# Altium PCB GROUND_TOP.PcbDoc
Units mm, origin at the board's own origin, x right, y up, seen from the top; angles counter-clockwise.
Board outline 43.94 x 42.93 mm, 2 copper layers (Top Layer, Bottom Layer); 82 components, 0 nets, 288 pads, 66 vias.
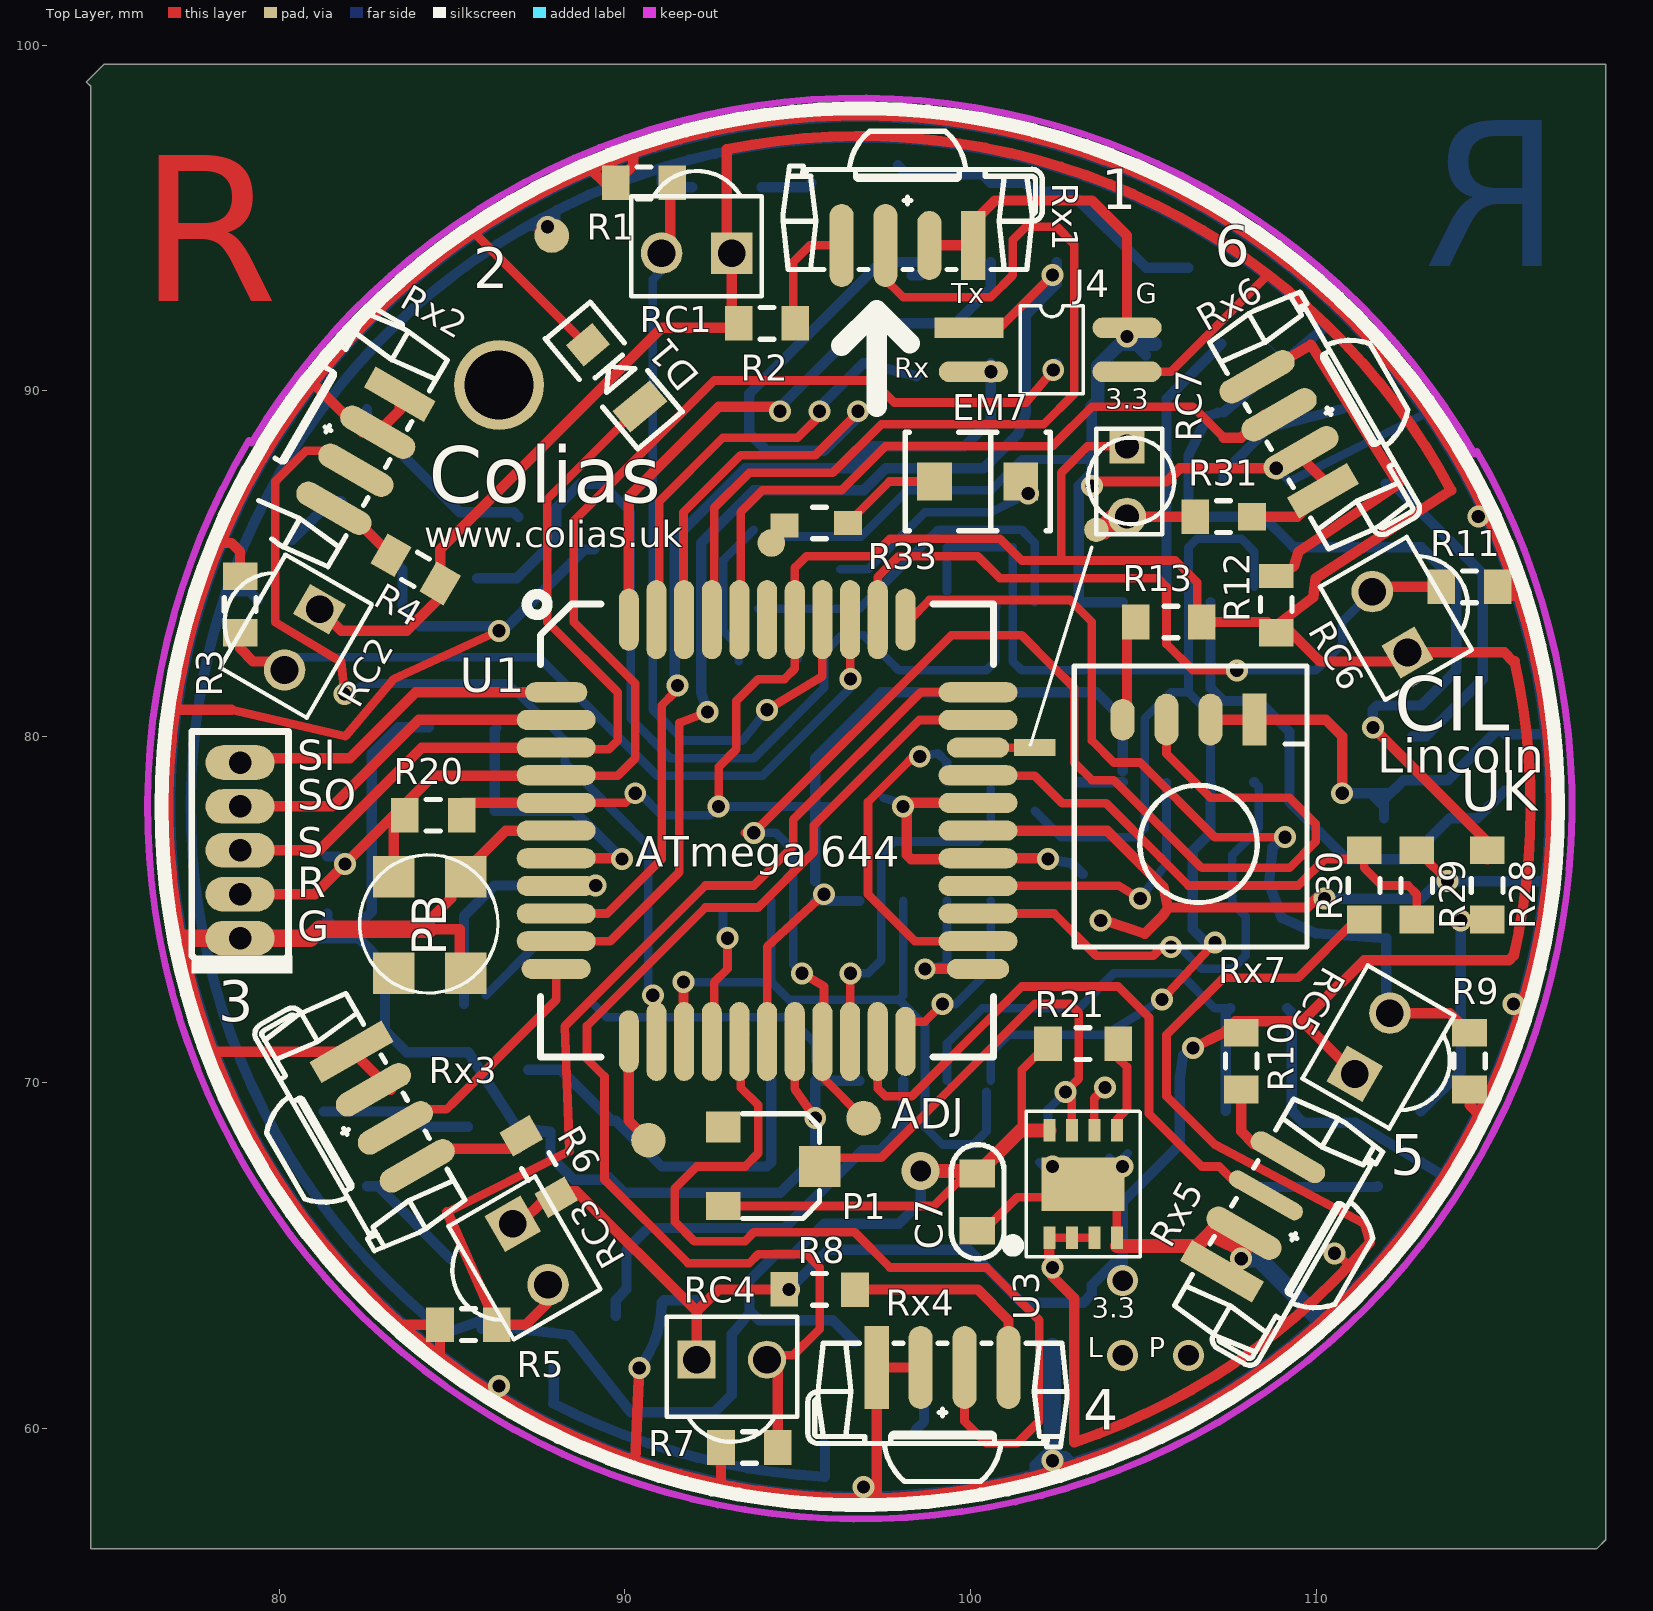
[diagram p0: Top Layer view]
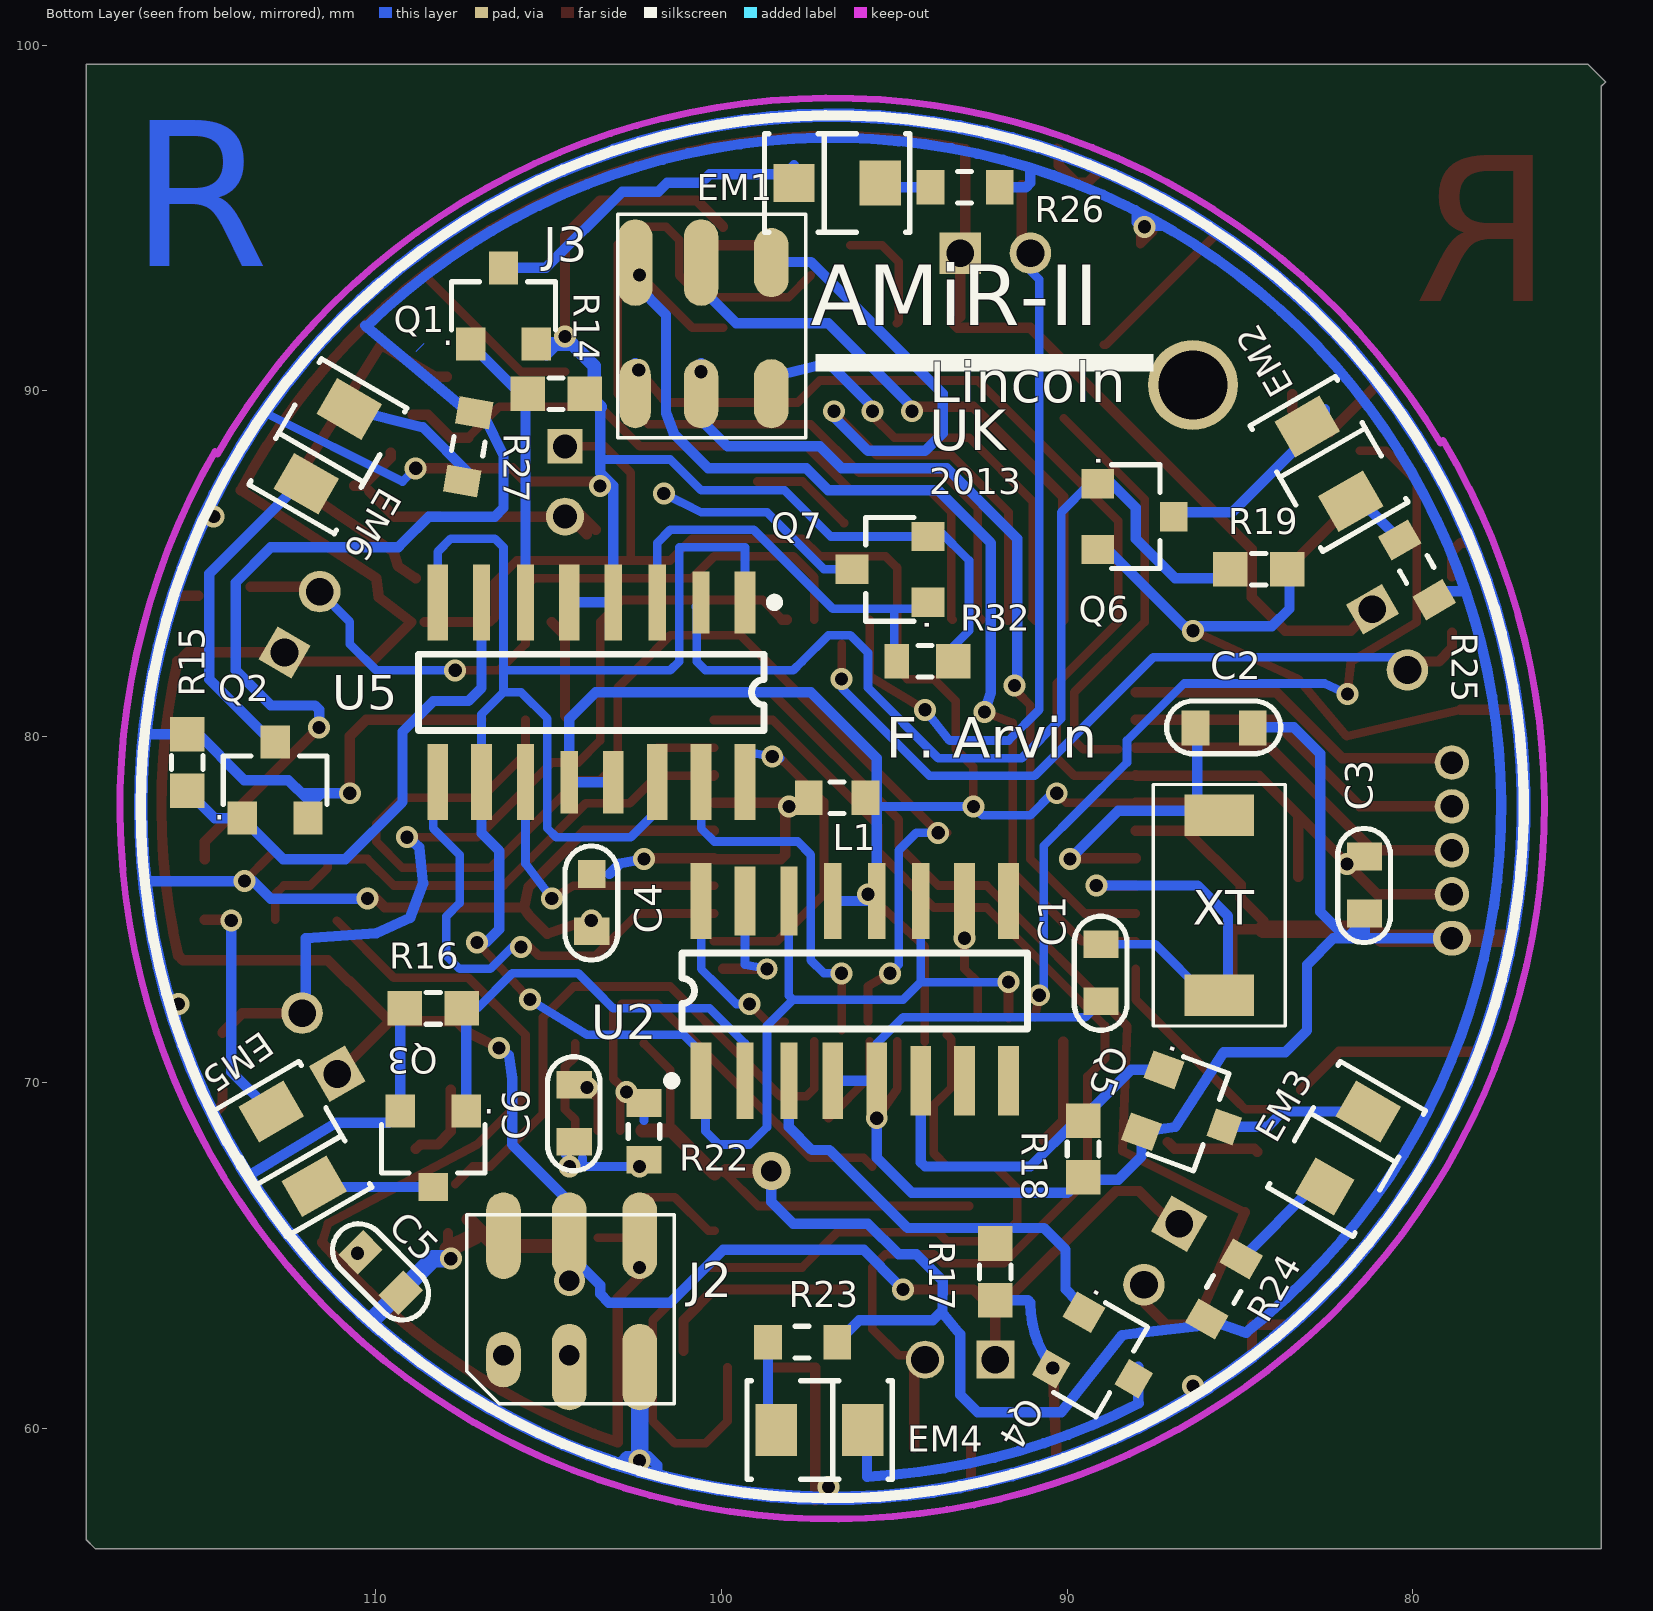
[diagram p1: Bottom Layer view, seen from below]

## Layer stack, top to bottom
Top Layer: signal copper 0.0356
Dielectric: dielectric 0.32, FR-4, Dk 4.8
Bottom Layer: signal copper 0.0356

## Board outline
74.422,98.933 74.549,98.806 74.549,56.515 118.11,56.515 118.364,56.769 118.364,99.441 74.93,99.441 74.422,98.933

## Design rules (kind name [scope] priority, off if disabled: settings)
Clearance [All] p1: gap=0.254
ComponentClearance [All] p1: gap=0.254 collisioncheckmode=3 verticalgap=0.254
PolygonConnect [All] p1: connectstyle=Relief reliefconductorwidth=0.254 reliefentries=4 polygonreliefangle="90 Angle"
RoutingVias [All] p1: holewidth=0.711 width=1.27 viastyle="Through Hole" minholewidth=0.711 minwidth=1.27 maxholewidth=0.711 maxwidth=1.27
SolderMaskExpansion [All] p1: expansion=0.102
TestPointUsage [All] p1: valid=0 allowmultiple=FALSE
Testpoint [All] p1: side=15 testpointundercomponent=TRUE minsize=1.016 maxsize=2.54 preferedsize=1.524 minholesize=0 maxholesize=1.016 preferedholesize=0.813 testpointgrid=0.025 style=1023 order=0-112345678
Width [All] p1: maxlimit=0.254 minlimit=0.254 preferedwidth=0.254
18 further rules are at their usual default settings.

## Components (designator, comment, footprint, x,y, rotation, side; value= is the part's Value field where it differs from the comment)
C1 "104" 0603C#1 89.027,73.152 r90 bottom (schematic designator C14)
C2 "104" 0603C#1 85.471,80.264 r180 bottom (schematic designator C14)
C3 "104" 0603C#1 81.407,75.692 r90 bottom (schematic designator C14)
C4 "104" 0603C#2 103.759,75.184 r90 bottom (schematic designator C14)
C5 "104" 0603C#1 109.855,64.516 r225 bottom (schematic designator C14)
C6 "104" 0603C#1 104.267,69.088 r90 bottom (schematic designator C14)
C7 "104" 0603C#1 100.203,66.548 r270 top (schematic designator C14)
D1 "LED0" 0805L 90.551,89.408 r310 top (schematic designator D4)
EM1 "" "PLCC-2 Acodado"#1 96.647,96.012 r0 bottom (schematic designator D7)
EM2 "" "PLCC-2 Acodado"#2 82.423,87.884 r60 bottom (schematic designator D7)
EM3 "" "PLCC-2 Acodado"#3 81.915,68.072 r120 bottom (schematic designator D7)
EM4 "" "PLCC-2 Acodado"#2 97.155,59.944 r180 bottom (schematic designator D7)
EM5 "" "PLCC-2 Acodado"#2 112.395,68.072 r240 bottom (schematic designator D7)
EM6 "" "PLCC-2 Acodado"#2 111.379,88.392 r300 bottom (schematic designator D7)
EM7 "" "PLCC-2 Acodado"#4 100.203,87.376 r0 top (schematic designator D7)
J2 "Comment" DIP6-2mm#1 102.362,64.516 r270 bottom
J3 "Comment" DIP6-2mm#2 98.552,92.456 r270 bottom
J4 "Comment" SOP4 99.695,91.821 r0 top
L1 "47ohm 0603" R0603(1608)#1 96.647,78.232 r180 bottom (schematic designator R46)
P1 "FDV301N" SOT23#1 94.107,67.564 r270 top (schematic designator V48)
Q1 "FDV301N" SOT23#2 106.299,92.456 r180 bottom (schematic designator V48)
Q2 "FDV301N" SOT23#2 112.903,78.74 r180 bottom (schematic designator V48)
Q3 "FDV301N" SOT23#3 108.331,68.072 r0 bottom (schematic designator V48)
Q4 "FDV301N" SOT23#4 89.027,61.976 r300 bottom (schematic designator V48)
Q5 "FDV301N" SOT23#3 86.487,69.088 r290 bottom (schematic designator V48)
Q6 "FDV301N" SOT23#3 88.011,86.36 r270 bottom (schematic designator V48)
Q7 "FDV301N" SOT23#2 95.123,84.836 r90 bottom (schematic designator V48)
R1 "47ohm 0603" R0603(1608)#1 90.551,96.012 r0 top (schematic designator R46)
R2 "47ohm 0603" R0603(1608)#1 94.107,91.948 r0 top (schematic designator R46)
R3 "47ohm 0603" R0603(1608)#1 78.867,83.82 r90 top (schematic designator R46)
R4 "47ohm 0603" R0603(1608)#1 83.947,84.836 r330 top (schematic designator R46)
R5 "47ohm 0603" R0603(1608)#1 85.471,62.992 r0 top (schematic designator R46)
R6 "47ohm 0603" R0603(1608)#2 87.503,67.564 r120 top (schematic designator R46)
R7 "47ohm 0603" R0603(1608)#1 93.599,59.436 r0 top (schematic designator R46)
R8 "47ohm 0603" R0603(1608)#2 95.631,64.008 r0 top (schematic designator R46)
R9 "47ohm 0603" R0603(1608)#1 114.427,70.612 r90 top (schematic designator R46)
R10 "47ohm 0603" R0603(1608)#1 107.823,70.612 r90 top (schematic designator R46)
R11 "47ohm 0603" R0603(1608)#1 114.427,84.328 r0 top (schematic designator R46)
R12 "47ohm 0603" R0603(1608)#3 108.839,83.82 r90 top (schematic designator R46)
R13 "47ohm 0603" R0603(1608)#4 105.791,83.312 r0 top (schematic designator R46)
R14 "47ohm 0603" R0603(1608)#5 104.775,89.916 r0 bottom (schematic designator R46)
R15 "47ohm 0603" R0603(1608)#5 115.443,79.248 r270 bottom (schematic designator R46)
R16 "47ohm 0603" R0603(1608)#5 108.331,72.136 r0 bottom (schematic designator R46)
R17 "47ohm 0603" R0603(1608)#5 92.075,64.516 r270 bottom (schematic designator R46)
R18 "47ohm 0603" R0603(1608)#5 89.535,68.072 r270 bottom (schematic designator R46)
R19 "47ohm 0603" R0603(1608)#5 84.455,84.836 r0 bottom (schematic designator R46)
R20 "47ohm 0603" R0603(1608)#1 84.455,77.724 r0 top (schematic designator R46)
R21 "47ohm 0603" R0603(1608)#6 103.251,71.12 r0 top (schematic designator R46)
R22 "47ohm 0603" R0603(1608)#1 102.235,68.58 r270 bottom (schematic designator R46)
R23 "47ohm 0603" R0603(1608)#7 97.663,62.484 r0 bottom (schematic designator R46)
R24 "47ohm 0603" R0603(1608)#7 85.471,64.008 r300 bottom (schematic designator R46)
R25 "47ohm 0603" R0603(1608)#7 79.883,84.836 r60 bottom (schematic designator R46)
R26 "47ohm 0603" R0603(1608)#7 92.964,95.885 r0 bottom (schematic designator R46)
R27 "47ohm 0603" R0603(1608)#7 107.315,88.392 r100 bottom (schematic designator R46)
R28 "47ohm 0603" R0603(1608)#7 114.935,75.692 r270 top (schematic designator R46)
R29 "47ohm 0603" R0603(1608)#7 112.903,75.692 r270 top (schematic designator R46)
R30 "47ohm 0603" R0603(1608)#7 111.379,75.692 r270 top (schematic designator R46)
R31 "47ohm 0603" R0603(1608)#8 107.315,86.36 r0 top (schematic designator R46)
R32 "47ohm 0603" R0603(1608)#9 94.107,82.176 r0 bottom (schematic designator R46)
R33 "47ohm 0603" R0603(1608)#10 95.631,86.176 r0 top (schematic designator R46)
RC1 "Comment" LED-1#1 92.075,91.948 r90 top
RC2 "Comment" LED-1#2 82.423,81.788 r150 top
RC3 "Comment" LED-1#1 89.027,66.04 r210 top
RC4 "Comment" LED-1#3 93.091,64.008 r270 top
RC5 "Comment" LED-1#1 109.855,72.136 r330 top
RC6 "Comment" LED-1#4 110.363,82.296 r30 top
RC7 "Comment" LED-1#5 106.553,87.376 r180 top
Rx1 "" TSOP5700TR#1 98.171,95.504 r0 top (schematic designator D24)
Rx2 "" TSOP5700TR#2 81.407,88.9 r60 top (schematic designator D24)
Rx3 "" TSOP5700TR#3 81.915,68.58 r120 top (schematic designator D24)
Rx4 "" TSOP5700TR#3 99.187,60.452 r180 top (schematic designator D24)
Rx5 "" TSOP5700TR#4 109.347,65.532 r240 top (schematic designator D24)
Rx6 "" TSOP5700TR#2 110.363,89.408 r300 top (schematic designator D24)
Rx7 "" TSOP5700TR#5 106.299,81.788 r0 top locked (schematic designator D24)
U1 "Comment" TQFP-44 88.011,81.28 r0 top locked
U2 "Comment" SOIC16#1 96.139,72.644 r180 bottom locked
U3 "-" "8-DFN 3X3X09" 103.251,67.056 r0 top (schematic designator N14)
U5 "Comment" SOIC16#2 103.759,81.28 r0 bottom locked
? "Comment" MHDR1X5#1 78.867,74.168 r90 top
? "Comment" MHDR1X5#2 78.867,74.168 r90 top locked
? "Comment" "PCBComponent_1 - duplicate4" 84.455,74.676 r90 top
? "Comment" "PCBComponent_1 - duplicate3" 85.471,75.184 r270 bottom locked

## Footprints (in the part's own frame and the unit in brackets; to place one, negate y for a bottom-side part, rotate by r counter-clockwise, add the part's x,y. Pads: shape width x height; smd on the part's side, far side on the other; paste and mask are expansions set on the pad)
"8-DFN 3X3X09" [mm] "8-Lead Plastic Dual Flat, No Lead Pack 3x3x0.9mm"
  rect 2.4x1.55 smd: 9(0,0)
  rect 0.35x0.65 smd: Adj(-0.325,1.55) C(0.325,1.55) GND(0.975,-1.55) OUT(-0.975,1.55) PWR(0.975,1.55) SHDN(0.325,-1.55) Vin(-0.975,-1.55) Vin(-0.325,-1.55)
  silkscreen extent -2.16,-2.1 1.65,2.1
0603C#1 [mil]
  rect 31.5x40 smd: 1(-32,-0.5) 2(33,-0.5)
  silkscreen extent -65,-30 65,30
0603C#2 [mil]
  rect 31.5x40 smd: 1(-32,-0.5)
  rect 31.5x31.5 smd: 2(33,-0.5)
  silkscreen extent -65,-30 65,30
0805L [mm]
  rect 0.8x1.4 smd: 1(-0.18,0)
  rect 0.8x1 smd: 2(-2.514,0)
  silkscreen extent -3.45,-0.84 0.72,0.84
DIP6-2mm#1 [mm]
  oval 2.5x1 smd: 3.3V(-1.047,-2.032) BAT(-1.047,0) GND(2.753,0) Light(2.753,-2.032) SP(-1.047,-3.937)
  oval 1.6x1 smd: SP(2.54,-3.937)
  silkscreen extent -1.65,-5 3.81,1
DIP6-2mm#2 [mm]
  oval 2x1 smd: LED(-1.25,0) LPWM(2.54,0) TXD(2.54,-2.032)
  oval 2.5x1 smd: RPWM(-1.25,-2.032) RXD(-1.25,-3.937)
  oval 2x0.9 smd: RST(2.54,-3.937)
  silkscreen extent -2.65,-4.45 3.81,1
LED-1#1 [mm]
  round 1.2 hole 0.8: 1(2.032,1.016)
  rect 1.2x1.2 hole 0.8: 2(2.032,-1.016)
  silkscreen extent 0.79,-1.89 4.41,1.89
LED-1#2 [mm]
  round 1.2 hole 0.8: 1(2.032,1.016)
  rect 1.2x1 hole 0.8: 2(2.032,-1.016)
  silkscreen extent 0.79,-1.89 4.41,1.89
LED-1#3 [mm]
  round 1.1 hole 0.8: 1(2.032,1.016)
  rect 1.1x1.1 hole 0.8: 2(2.032,-1.016)
  silkscreen extent 0.79,-1.89 4.41,1.89
LED-1#4 [mm]
  round 1.2 hole 0.8: 1(2.032,1.016)
  rect 1.1x1.1 hole 0.8: 2(2.032,-1.016)
  silkscreen extent 0.79,-1.89 4.41,1.89
LED-1#5 [mm]
  round 1.1 hole 0.7: 1(2.032,1.016)
  rect 1x1 hole 0.7: 2(2.032,-1.016)
  silkscreen extent 0.66,-1.52 3.16,1.52
MHDR1X5#1 [mm]
  oval 1x2 smd: GND(0,0) MISO(3.81,0) MOSI(5.08,0) RST(1.27,0) SCK(2.54,0)
  silkscreen extent -0.9,-1.4 5.98,1.4
MHDR1X5#2 [mm]
  oval 1x1.1 hole 0.65: GND(0,0)
  round 1 hole 0.65: MISO(3.81,0) MOSI(5.08,0) RST(1.27,0) SCK(2.54,0)
"PCBComponent_1 - duplicate3" [mm]
  rect 1.2x2 smd: X(-2.54,-0.127) X(2.667,-0.127)
  silkscreen extent -3.43,-2.03 3.56,1.78
"PCBComponent_1 - duplicate4" [mm]
  rect 1.2x1.2 smd: A(-1.527,-0.946) A(1.273,-0.946) B(-1.524,1.143) B(1.27,1.143)
  silkscreen extent -2.09,-1.87 1.9,2.12
"PLCC-2 Acodado"#1 [mm] "SMD LED Acodado; 2 C-Bend Leads; Body 3.8 x 3.8mm,"
  rect 1.2x1.3 smd: 1(-1.25,0)
  rect 1.2x1.1 smd: 2(1.25,0)
  silkscreen extent -2.1,-1.43 2.1,1.43
"PLCC-2 Acodado"#2 [mm] "SMD LED Acodado; 2 C-Bend Leads; Body 3.8 x 3.8mm,"
  rect 1.2x1.5 smd: 1(-1.25,0) 2(1.25,0)
  silkscreen extent -2.1,-1.43 2.1,1.43
"PLCC-2 Acodado"#3 [mm] "SMD LED Acodado; 2 C-Bend Leads; Body 3.8 x 3.8mm,"
  rect 1.2x1.3 smd: 1(-1.25,0)
  rect 1.2x1.5 smd: 2(1.25,0)
  silkscreen extent -2.1,-1.43 2.1,1.43
"PLCC-2 Acodado"#4 [mm] "SMD LED Acodado; 2 C-Bend Leads; Body 3.8 x 3.8mm,"
  rect 1x1.1 smd: 1(-1.25,0) 2(1.25,0)
  silkscreen extent -2.1,-1.43 2.1,1.43
R0603(1608)#1 [mm] "Chip Resistor, Body 1.6x0.8mm, IPC Medium Density"
  rect 0.8x1 smd: 1(-0.82,0) 2(0.82,0)
  silkscreen extent -0.2,-0.46 0.2,0.46
R0603(1608)#2 [mm] "Chip Resistor, Body 1.6x0.8mm, IPC Medium Density"
  rect 0.8x1 smd: 1(-1.024,0.005) 2(1.024,-0.005)
  silkscreen extent -0.2,-0.46 0.2,0.46
R0603(1608)#3 [mm] "Chip Resistor, Body 1.6x0.8mm, IPC Medium Density"
  rect 0.8x1 smd: 1(-0.82,0)
  rect 0.7x1 smd: 2(0.82,0)
  silkscreen extent -0.2,-0.46 0.2,0.46
R0603(1608)#4 [mm] "Chip Resistor, Body 1.6x0.8mm, IPC Medium Density"
  rect 0.8x1 smd: 1(-1.016,0) 2(0.889,0)
  silkscreen extent -0.2,-0.46 0.2,0.46
R0603(1608)#5 [mm] "Chip Resistor, Body 1.6x0.8mm, IPC Medium Density"
  rect 1x1 smd: 1(-0.82,0) 2(0.82,0)
  silkscreen extent -0.2,-0.46 0.2,0.46, body extent -0.85,-0.48 0.85,0.48, height 0.6
R0603(1608)#6 [mm] "Chip Resistor, Body 1.6x0.8mm, IPC Medium Density"
  rect 0.8x1 smd: 1(-1.016,0) 2(1.016,0)
  silkscreen extent -0.2,-0.46 0.2,0.46, body extent -0.85,-0.48 0.85,0.48, height 0.6
R0603(1608)#7 [mm] "Chip Resistor, Body 1.6x0.8mm, IPC Medium Density"
  rect 0.8x1 smd: 1(-1.016,0) 2(0.986,0)
  silkscreen extent -0.2,-0.46 0.2,0.46
R0603(1608)#8 [mm] "Chip Resistor, Body 1.6x0.8mm, IPC Medium Density"
  rect 0.8x1 smd: 1(-0.82,0)
  rect 0.8x0.8 smd: 2(0.82,0)
  silkscreen extent -0.2,-0.46 0.2,0.46
R0603(1608)#9 [mm] "Chip Resistor, Body 1.6x0.8mm, IPC Medium Density"
  rect 1x1 smd: 1(-0.82,0)
  rect 0.7x1 smd: 2(0.82,0)
  silkscreen extent -0.2,-0.46 0.2,0.46, body extent -0.85,-0.48 0.85,0.48, height 0.6
R0603(1608)#10 [mm] "Chip Resistor, Body 1.6x0.8mm, IPC Medium Density"
  rect 0.8x0.7 smd: 1(-1.016,-0.07) 2(0.82,0)
  silkscreen extent -0.2,-0.46 0.2,0.46
SOIC16#1 [mm] "Small Outline; 16 Leads; Body Width 3.9 mm; Pitch 1.27 mm"
  rect 0.6x2.2 smd: 1(-4.445,-2.6) 4(-0.635,-2.6) 5(0.635,-2.6) 9(4.445,2.6) 10(3.175,2.6) 16(-4.445,2.6)
  rect 0.5x2.2 smd: 2(-3.175,-2.6) 3(-1.905,-2.6) 11(1.905,2.6) 12(0.635,2.6) 13(-0.635,2.6)
  rect 0.6x2 smd: 6(1.905,-2.6) 7(3.175,-2.6) 8(4.445,-2.6) 15(-3.175,2.6)
  rect 0.5x2 smd: 14(-1.905,2.6)
  silkscreen extent -5.42,-2.72 5,1.1
SOIC16#2 [mm] "Small Outline; 16 Leads; Body Width 3.9 mm; Pitch 1.27 mm"
  rect 0.6x1.8 smd: 1(-4.445,-2.6) 13(-0.635,2.6)
  rect 0.5x1.8 smd: 2(-3.175,-2.6) 12(0.635,2.6)
  rect 0.5x2.2 smd: 3(-1.905,-2.6) 4(-0.635,-2.6) 6(1.905,-2.6) 7(3.175,-2.6) 11(1.905,2.6)
  rect 0.6x2.2 smd: 5(0.635,-2.6) 8(4.445,-2.6) 9(4.445,2.6) 10(3.175,2.6) 14(-1.905,2.6) 15(-3.175,2.6) 16(-4.445,2.6)
  silkscreen extent -5.42,-2.72 5,1.1
SOP4 [mm]
  oval 2x0.6 smd: 3.3V(4.826,-1.27) GND(4.826,0) RxD(0.381,-1.27)
  rect 2x0.6 smd: TxD(0.254,0)
  silkscreen extent 1.74,-1.91 3.56,0.64
SOT23#1 [mm] "SOT23, 3-Leads, Body 2.9x1.3mm, Pitch 0.95mm, Lead Span 2.5mm, IPC Medium Density"
  rect 0.9x1 smd: 1(-1.143,-1.27)
  rect 0.8x1 smd: 2(1.143,-1.27)
  rect 1.2x1.2 smd: 3(0,1.524)
  silkscreen extent -1.52,-0.7 1.5,1.52
SOT23#2 [mm] "SOT23, 3-Leads, Body 2.9x1.3mm, Pitch 0.95mm, Lead Span 2.5mm, IPC Medium Density"
  rect 0.85x0.95 smd: Drain(0,1.1) Gate(-0.95,-1.1) S(0.95,-1.1)
  silkscreen extent -1.5,-0.7 1.5,0.7, body extent -1.5,-0.7 1.5,0.7, height 1.1
SOT23#3 [mm] "SOT23, 3-Leads, Body 2.9x1.3mm, Pitch 0.95mm, Lead Span 2.5mm, IPC Medium Density"
  rect 0.85x0.8 smd: Drain(0,1.1)
  rect 0.85x0.95 smd: Gate(-0.95,-1.1) S(0.95,-1.1)
  silkscreen extent -1.5,-0.7 1.5,0.7, body extent -1.5,-0.7 1.5,0.7, height 1.1
SOT23#4 [mm] "SOT23, 3-Leads, Body 2.9x1.3mm, Pitch 0.95mm, Lead Span 2.5mm, IPC Medium Density"
  rect 0.85x0.8 smd: Drain(0,1.1) S(0.95,-1.1)
  rect 0.85x0.95 smd: Gate(-0.95,-1.1)
  silkscreen extent -1.5,-0.7 1.5,0.7, body extent -1.5,-0.7 1.5,0.7, height 1.1
TQFP-44 [mm]
  oval 1.8x0.58 smd: 1(0,0) 23(12.2,-8) 31(12.2,-1.6)
  oval 2.286x0.58 smd: 2(0,-0.8) 3(0,-1.6) 4(0,-2.4) 5(0,-3.2) 6(0,-4) 7(0,-4.8) 8(0,-5.6) 9(0,-6.4) 10(0,-7.2) 24(12.2,-7.2) 25(12.2,-6.4) 26(12.2,-5.6) 27(12.2,-4.8) 28(12.2,-4) 29(12.2,-3.2) 30(12.2,-2.4) 32(12.2,-0.8) 33(12.2,0)
  oval 2x0.58 smd: 11(0,-8)
  oval 0.58x1.8 smd: 12(2.1,-10.1) 34(10.1,2.1) 44(2.1,2.1)
  oval 0.58x2.286 smd: 13(2.9,-10.1) 14(3.7,-10.1) 15(4.5,-10.1) 16(5.3,-10.1) 17(6.1,-10.1) 18(6.9,-10.1) 19(7.7,-10.1) 20(8.5,-10.1) 21(9.3,-10.1) 35(9.3,2.1) 36(8.5,2.1) 37(7.7,2.1) 38(6.9,2.1) 39(6.1,2.1) 40(5.3,2.1) 41(4.5,2.1) 42(3.7,2.1) 43(2.9,2.1)
  oval 0.58x2 smd: 22(10.1,-10.1)
  silkscreen extent -0.45,-10.55 12.65,2.55
TSOP5700TR#1 [mm] "Vishay IR, Top Mount, Body 7.5x4mm"
  oval 0.7x2 smd: GND(0.635,-1.3)
  rect 0.7x2 smd: GND(1.905,-1.3)
  oval 0.7x2.4 smd: OUT(-0.635,-1.3) V(-1.905,-1.3)
  silkscreen extent -3.6,-2 3.9,2
TSOP5700TR#2 [mm] "Vishay IR, Top Mount, Body 7.5x4mm"
  oval 0.7x2.4 smd: GND(0.635,-1.3) OUT(-0.635,-1.3) V(-1.905,-1.3)
  rect 0.7x2 smd: GND(1.905,-1.3)
  silkscreen extent -3.6,-2 3.7,0.9
TSOP5700TR#3 [mm] "Vishay IR, Top Mount, Body 7.5x4mm"
  oval 0.7x2.4 smd: GND(0.635,-1.3) OUT(-0.635,-1.3) V(-1.905,-1.3)
  rect 0.7x2.4 smd: GND(1.905,-1.3)
  silkscreen extent -3.6,-2 3.9,2
TSOP5700TR#4 [mm] "Vishay IR, Top Mount, Body 7.5x4mm"
  oval 0.7x2.4 smd: GND(0.635,-1.3)
  rect 0.7x2.4 smd: GND(1.905,-1.3)
  oval 0.5x2.4 smd: OUT(-0.635,-1.3)
  oval 0.6x2.4 smd: V(-1.905,-1.3)
  silkscreen extent -3.6,-2 3.9,2
TSOP5700TR#5 [mm] "Vishay IR, Top Mount, Body 7.5x4mm"
  oval 0.7x1.5 smd: GND(0.635,-1.3) OUT(-0.635,-1.3)
  rect 0.7x1.5 smd: GND(1.905,-1.3)
  oval 0.7x1.2 smd: V(-1.905,-1.3)
  silkscreen extent -3.3,-7.87 3.43,0.25

## Part data
C1 C2 C3 C4 C5 C6 C7: library part CAP, "Capacitor"
D1: "Typical INFRARED GaAs LED"
EM1 EM2 EM3 EM4 EM5 EM6 EM7: library part SFH4655Z, "LED IR 850nM SMD 20º"
L1 R1 R2 R3 R4 R5 R6 R7 R8 R9 R10 R11 R12 R13 R14 R15 R16 R17 R18 R19 R20 R21 R22 R23 R24 R25 R26 R27 R28 R29 R30 R31 R32 R33: library part "R47 0603 5%", "Resistencia SMT Generica"
P1 Q1 Q2 Q3 Q4 Q5 Q6 Q7: "N-Channel MOSFET, 0.22A, 25V Vgs=2.7V Rds(on)=5"
Rx1 Rx2 Rx3 Rx4 Rx5 Rx6 Rx7: library part TSOP5700TR, "Infrared Receiver Module 2.7-5.5V 455kHz"
U3: library part MCP1727-ADJE/MF

## Free pads (board coordinates)
  round 1 smd: 0(87.884,94.488) 0(90.678,68.326) 0(96.901,68.961)
  round 0.8 smd: 0(94.234,85.598)
  rect 1.2x0.5 smd: 0(101.854,79.68)
  round 0.7 smd: 0(103.632,85.979)
  round 2.6 hole 2: 3(86.36,90.17)

## Via types
v1: diameter 0.635, hole 0.381, Top Layer to Bottom Layer, 61 vias
v2: diameter 0.9, hole 0.6, Top Layer to Bottom Layer, 3 vias
v3: diameter 0.6, hole 0.381, Top Layer to Bottom Layer, 1 vias
v4: diameter 1.1, hole 0.6, Top Layer to Bottom Layer, 1 vias

## Nets (pads, with @x,y where several pads share a name; then routed paths per layer and width w, separated by ;. In a path a pad name is that pad's centre, name@x,y a point inside that pad or via, vN(x,y) a via of type N, cw(c..) or ccw(c..) an arc to the next point about the centre after c; other vN are vias at no path point)
pads on no net: ?.A ?.B ?.GND ?.MISO ?.MOSI ?.RST ?.SCK ?.X C1.1 C1.2 C2.1 C2.2 C3.1 C3.2 C4.1 C4.2 C5.1 C5.2 C6.1 C6.2 C7.1 C7.2 D1.1 D1.2 EM1.1 EM1.2 EM2.1 EM2.2 EM3.1 EM3.2 EM4.1 EM4.2 EM5.1 EM5.2 EM6.1 EM6.2 EM7.1 EM7.2 J2.3.3V J2.BAT J2.GND J2.Light J2.SP J3.LED J3.LPWM J3.RPWM J3.RST J3.RXD J3.TXD J4.3.3V J4.GND J4.RxD J4.TxD L1.1 L1.2 P1.1 P1.2 P1.3 Q1.Drain Q1.Gate Q1.S Q2.Drain Q2.Gate Q2.S Q3.Drain Q3.Gate Q3.S Q4.Drain Q4.Gate Q4.S Q5.Drain Q5.Gate Q5.S Q6.Drain Q6.Gate Q6.S Q7.Drain Q7.Gate Q7.S R1.1 R1.2 R2.1 R2.2 R3.1 R3.2 R4.1 R4.2 R5.1 R5.2 R6.1 R6.2 R7.1 R7.2 R8.1 R8.2 R9.1 R9.2 R10.1 R10.2 R11.1 R11.2 R12.1 R12.2 R13.1 R13.2 R14.1 R14.2 R15.1 R15.2 R16.1 R16.2 R17.1 R17.2 R18.1 R18.2 R19.1 R19.2 R20.1 R20.2 R21.1 R21.2 R22.1 R22.2 R23.1 R23.2 R24.1 R24.2 R25.1 R25.2 R26.1 R26.2 R27.1 R27.2 R28.1 R28.2 R29.1 R29.2 R30.1 R30.2 R31.1 R31.2 R32.1 R32.2 R33.1 R33.2 RC1.1 RC1.2 RC2.1 RC2.2 RC3.1 RC3.2 RC4.1 RC4.2 RC5.1 RC5.2 RC6.1 RC6.2 RC7.1 RC7.2 Rx1.GND Rx1.OUT Rx1.V Rx2.GND Rx2.OUT Rx2.V Rx3.GND Rx3.OUT Rx3.V Rx4.GND Rx4.OUT Rx4.V Rx5.GND Rx5.OUT Rx5.V Rx6.GND Rx6.OUT Rx6.V Rx7.GND Rx7.OUT Rx7.V U1.1 U1.2 U1.3 U1.4 U1.5 U1.6 U1.7 U1.8 U1.9 U1.10 U1.11 U1.12 U1.13 U1.14 U1.15 U1.16 U1.17 U1.18 U1.19 U1.20 U1.21 U1.22 U1.23 U1.24 U1.25 U1.26 U1.27 U1.28 U1.29 U1.30 U1.31 U1.32 U1.33 U1.34 U1.35 U1.36 U1.37 U1.38 U1.39 U1.40 U1.41 U1.42 U1.43 U1.44 U2.1 U2.2 U2.3 U2.4 U2.5 U2.6 U2.7 U2.8 U2.9 U2.10 U2.11 U2.12 U2.13 U2.14 U2.15 U2.16 U3.9 U3.Adj U3.C U3.GND U3.OUT U3.PWR U3.SHDN U3.Vin U5.1 U5.2 U5.3 U5.4 U5.5 U5.6 U5.7 U5.8 U5.9 U5.10 U5.11 U5.12 U5.13 U5.14 U5.15 U5.16
copper on no net: | length 1732.6
  Top Layer w0.25: 78.613,80.772 81.915,80.01 83.312,81.661 v1(86.36,83.058) ; 81.534,88.265 80.772,88.265 80.137,87.63 79.883,87.376 79.883,83.312 81.788,82.169 v1(81.892,81.232) ; 83.947,69.215 84.836,69.215 85.09,69.469 88.011,72.39 88.011,73.28 ; 84.859,66.242 88.394,68.01 88.256,71.619 92.329,75.692 93.726,75.692 94.869,76.835 94.869,77.597 98.552,81.28 100.211,81.28 ; 85.598,94.615 88.879,91.334 88.935,91.334 ; v1@87.503,94.615 87.884,94.234 v1@87.884,94.488 ; 87.998,78.867 89.789,78.867 90.297,79.375 90.297,81.534 88.519,83.312 88.519,86.233 92.583,90.297 94.488,90.297 97.155,90.297 97.79,89.662 101.6,89.662 v1(102.387,90.602) ; 88.011,74.08 89.574,74.08 91.567,76.073 91.567,80.391 v1(92.391,80.713) ; 88.011,74.88 89.485,74.88 91.059,76.454 91.059,80.899 v1@91.44,81.28 ; 88.011,78.08 90.018,78.08 v1(90.297,78.359) ; 88.519,79.629 89.535,79.629 89.789,79.883 89.789,81.28 87.757,83.312 87.757,86.867 90.1,89.21 ; 90.239,96.97 90.297,97.028 ; v1(90.805,72.517) 90.932,71.882 ; 90.995,83.465 90.995,86.804 92.837,88.646 94.996,88.646 95.631,89.281 v1(95.631,89.408) ; 91.694,83.397 91.694,86.487 93.345,88.138 95.504,88.138 v1@96.774,89.408 ; 92.583,71.882 92.583,72.898 92.964,73.279 v1(92.964,74.168) ; 92.583,83.452 92.583,86.614 93.599,87.63 96.012,87.63 97.409,89.027 102.108,89.027 102.997,89.916 102.997,91.313 102.997,94.234 102.489,94.742 101.6,94.742 101.219,94.361 101.219,93.345 100.584,92.71 98.044,92.71 97.409,93.345 ; v1(92.71,77.978) 92.71,79.121 93.218,79.629 93.218,81.026 93.853,81.661 94.615,81.661 94.911,81.957 94.911,83.38 94.911,84.878 94.996,84.963 95.25,85.217 97.155,85.217 97.663,85.725 99.568,85.725 100.838,85.725 101.473,85.09 ; 92.837,66.421 98.933,66.421 99.905,67.393 ; 93.091,92.144 93.287,91.948 ; 93.311,83.38 93.345,83.414 93.345,85.598 93.345,86.487 93.98,87.122 96.266,87.122 97.536,88.392 102.362,88.392 103.505,89.535 104.394,89.535 106.426,89.535 107.315,88.646 ; 93.345,70.136 93.345,71.247 93.472,71.374 ; 93.345,70.866 93.345,69.85 93.853,69.342 93.853,67.945 93.472,67.564 92.075,67.564 91.44,66.929 91.44,65.971 92.006,65.405 93.472,65.405 93.726,65.659 96.647,65.659 97.663,64.643 100.457,64.643 101.981,63.119 101.981,60.198 101.346,59.563 100.457,59.563 99.822,60.198 99.822,61.752 ; v1@93.472,77.216 v1(93.726,77.216) 99.441,82.931 101.473,82.931 102.362,82.042 102.997,81.407 102.997,79.248 103.505,78.74 104.14,78.74 104.521,78.359 106.68,76.2 109.22,76.2 109.982,76.962 109.982,77.47 109.22,78.232 106.934,78.232 105.664,79.502 105.664,80.488 ; v1(94.107,80.772) 95.711,81.741 95.711,83.38 ; 94.111,71.18 94.111,73.918 v1(95.758,75.438) ; 94.234,62.103 94.869,62.103 95.631,62.865 95.631,64.643 95.25,65.024 94.424,65.024 93.853,65.024 93.599,64.77 91.821,64.77 89.408,67.183 89.408,70.168 88.9,70.675 88.9,71.628 92.329,75.057 93.853,75.057 95.463,76.667 95.463,77.429 96.901,78.867 97.666,79.632 98.514,80.48 100.211,80.48 ; 94.911,71.18 94.911,69.808 v1(95.504,68.961) ; 94.927,91.948 94.869,92.006 94.869,93.726 95.347,94.204 96.266,94.204 ; v1(95.123,73.152) 95.758,72.771 95.758,71.755 ; 95.631,67.564 95.885,67.818 97.409,67.818 99.441,69.85 101.854,72.263 102.87,72.263 103.124,72.009 103.124,70.104 102.926,69.906 102.926,68.606 ; 95.711,71.18 95.711,70.151 96.901,68.961 ; 96.451,86.176 97.651,87.376 98.953,87.376 ; 96.52,71.501 v1(96.52,73.152) ; v1(96.52,81.661) 96.52,82.677 ; 97.311,71.18 97.311,69.821 97.536,69.596 98.298,69.596 100.457,71.755 101.473,72.771 104.267,72.771 105.156,71.882 105.156,69.088 106.68,67.564 107.188,67.564 107.696,67.056 ; 97.311,83.38 97.311,84.611 97.917,85.217 100.203,85.217 100.838,84.582 105.41,84.582 105.664,84.328 105.664,82.677 106.426,81.915 v1(107.696,81.915) ; 98.171,71.755 98.679,71.755 v1(99.187,72.263) ; 98.239,83.38 98.806,83.947 102.87,83.947 103.505,83.312 103.505,79.883 104.14,79.248 104.902,79.248 107.061,77.089 v1(109.093,77.089) ; v1@98.298,79.375 98.044,79.121 97.028,78.105 97.028,75.438 98.386,74.08 100.211,74.08 ; 99.86,67.437 99.905,67.393 ; 99.949,91.821 100.838,91.821 v1(102.362,93.345) ; 100.159,67.393 99.905,67.393 ; 100.19,65.71 100.381,65.71 101.346,66.675 102.489,66.675 ; 100.211,74.88 102.412,74.88 103.632,73.66 105.283,73.66 105.537,73.914 v1(105.791,73.914) ; 100.211,75.68 101.739,75.68 104.279,75.68 v1(104.902,75.311) ; 100.211,79.68 101.854,79.68 ; 100.224,78.867 101.854,78.867 102.648,78.073 103.918,78.073 105.505,76.486 106.299,75.692 109.474,75.692 110.236,76.454 ; 101.436,68.606 101.473,68.643 101.473,70.358 102.235,71.12 ; v1@102.276,64.729 v1(102.362,64.643) v1@102.362,64.389 ; 102.276,65.506 103.576,65.506 ; 103.576,68.606 103.576,69.54 v1(103.886,69.85) ; 104.226,65.265 104.226,66.507 104.267,66.548 ; 104.226,68.606 104.226,68.92 104.521,69.215 104.521,70.196 104.521,70.444 104.226,70.739 104.226,71.12 ; 104.521,88.392 103.378,88.392 102.616,87.63 102.616,85.09 101.473,85.09 ; 104.521,90.551 105.791,90.551 108.585,93.345 ; v1(105.537,72.39) v1(107.061,74.041) ; 106.68,83.312 106.553,83.439 106.553,84.455 105.918,85.09 101.473,85.09 ; v1(110.52,65.054) 110.587,65.054 110.871,64.77 ; 111.125,74.676 109.474,73.025 107.315,73.025 105.664,71.374 105.664,69.596 106.045,69.215 107.061,68.199 111.376,65.914 111.544,65.369 ; 111.379,76.454 111.379,76.2 111.887,75.692 112.649,75.692 112.903,75.438 112.903,74.706 ; 112.903,76.708 v1@113.919,75.692
  Top Layer w0.256: 110.236,76.454 111.379,76.454
  Top Layer w0.3: 76.962,80.772 78.613,80.772 ; 77.978,70.993 78.091,70.88 82.131,70.88 82.596,70.415 83.231,69.78 ; 78.359,85.598 78.613,85.598 78.867,85.344 78.867,84.64 ; 78.867,74.168 78.994,74.168 ; 78.867,75.438 81.026,75.438 84.455,78.867 87.998,78.867 88.011,78.88 ; 78.867,76.708 81.153,76.708 84.125,79.68 88.011,79.68 ; 78.867,77.978 81.534,77.978 84.036,80.48 88.011,80.48 ; 78.867,83 78.867,82.55 79.248,82.169 80.264,82.169 ; 79.121,79.248 79.248,79.375 82.042,79.375 83.947,81.28 88.011,81.28 ; 81.026,90.17 82.396,88.8 82.85,88.8 83.485,89.435 83.485,89.9 ; 81.171,83.684 81.797,83.058 83.693,83.058 84.657,84.022 84.657,84.426 84.657,85.419 91.059,91.821 93.16,91.821 93.287,91.948 ; 81.58,86.6 81.883,86.6 83.237,85.246 ; 83.27,77.682 83.312,77.64 83.312,75.946 ; 83.566,62.992 84.651,62.992 84.651,62.034 84.709,61.976 ; 84.501,67.991 84.582,68.072 86.891,68.072 87.093,68.274 ; 84.859,66.242 86.291,62.992 87.131,62.992 87.775,63.636 ; 85.217,73.152 85.217,74.422 84.328,74.422 84.328,74.676 84.979,75.327 84.979,75.708 86.551,77.28 86.932,77.28 88.011,77.28 ; 85.275,77.724 85.275,78.036 85.319,78.08 88.011,78.08 ; 86.759,65.396 86.759,65.7 87.913,66.854 88.594,66.854 92.075,63.373 ; 88.011,75.68 89.142,75.68 v1(89.154,75.692) ; 88.011,76.48 89.89,76.48 v1(89.916,76.454) ; 89.027,96.393 89.408,96.012 89.731,96.012 90.239,96.52 90.239,96.97 ; 90.111,71.18 90.111,68.893 90.678,68.326 ; 90.111,83.38 90.111,86.936 92.71,89.535 v1@94.488,89.535 ; 90.297,59.055 v1(90.414,61.735) ; 90.911,83.38 90.995,83.465 ; 91.313,94.361 91.313,95.943 ; 91.694,71.882 91.694,72.644 v1(91.694,72.898) ; 91.694,83.397 91.711,83.38 ; 92.075,61.976 92.075,63.373 ; 92.511,83.38 92.583,83.452 ; 92.779,59.436 92.779,58.351 92.837,58.293 ; 93.091,92.144 93.091,93.98 92.947,94.124 92.947,96.983 cw(c96.792,77.968) 113.896,87.122 109.982,84.582 109.909,84.033 108.966,83.312 110.109,82.169 112.368,82.169 112.631,82.432 115.434,82.432 115.697,82.169 ; 94.107,61.976 94.419,61.664 94.419,59.436 ; v1@94.811,64.008 92.71,64.008 92.075,63.373 ; 96.451,64.008 100.203,64.008 101.092,63.119 101.092,62.23 ; v1@96.774,89.408 v1@96.901,89.408 ; 97.282,57.912 97.282,61.752 98.552,61.752 ; 98.111,83.38 98.239,83.38 ; v3(98.679,73.279) 99.949,73.279 ; 98.806,94.204 100.076,94.204 ; 99.949,94.742 100.711,95.504 103.505,95.504 104.521,94.488 v1(104.521,91.567) ; 100.211,77.28 103.949,77.28 105.574,75.655 105.711,75.043 ; 100.211,78.08 98.146,78.08 98.146,76.581 98.273,76.454 100.185,76.454 100.211,76.48 101.955,76.48 v1(102.235,76.454) ; 100.211,78.88 100.224,78.867 ; v1@102.276,64.729 102.276,65.506 ; v1(102.362,64.643) 102.362,64.389 102.997,63.754 102.997,59.585 ; 102.99,59.585 ccw(c96.792,77.968) 111.544,65.369 ; v1(103.505,87.249) 103.632,87.376 105.664,87.376 106.045,87.757 v1(108.839,87.757) ; 103.632,85.979 104.14,86.487 ; v1@103.886,74.676 105.029,74.295 105.537,74.803 105.711,75.043 ; 103.886,85.852 104.267,86.233 ; 104.394,80.488 104.521,80.615 104.521,82.931 104.902,83.312 ; 104.521,86.36 106.495,86.36 ; v1(106.426,70.993) 107.315,71.432 107.647,71.764 109.583,71.764 ; 106.934,80.488 108.204,80.488 ; 107.119,83.312 108.585,83.312 ; 107.315,88.646 107.823,88.646 108.485,89.308 108.92,89.308 ; 107.823,69.792 107.823,69.284 107.823,68.58 108.204,68.199 108.712,68.199 108.839,68.072 ; v1@107.904,65.167 107.904,65.632 ; 107.934,90.408 108.285,90.408 109.837,91.33 112.373,87.295 109.485,85.349 109.35,84.926 108.839,84.582 ; 108.135,86.36 109.441,86.36 110.19,87.108 ; 109.555,88.208 109.555,88.057 110.363,87.249 110.617,87.249 ; 109.601,80.488 108.204,80.488 ; v1@110.045,75.374 109.731,75.06 105.711,75.043 ; v1(110.744,78.359) 110.744,80.01 110.266,80.488 108.204,80.488 ; 111.107,70.24 109.583,71.764 ; 111.615,84.192 111.947,84.192 112.083,84.328 113.607,84.328 ; v1(111.633,80.264) 114.935,76.962 114.935,76.454 ; 112.123,72 113.859,72 114.427,71.432 ; v1(114.173,74.676) 114.143,74.706 114.935,74.706 ; 114.427,69.792 114.427,69.342 114.681,69.088 ; 115.12,84.074 115.697,84.074 ; 115.697,73.66 115.57,73.533 111.379,73.533 110.771,72.925 110.744,72.925 109.583,71.764 ; 115.707,73.658 ccw(c96.792,77.968) 115.73,82.176 ; 116.792,77.968 ccw(c96.792,77.968) 116.792,77.968
  Top Layer w0.4: v4(98.552,67.437) 99.86,67.437 ; 100.19,67.361 101.436,68.606 102.276,68.606 ; 104.226,65.265 106.54,65.265 107.315,66.04
  Top Layer w0.5: 77.197,74.168 79.248,74.168 ; 78.994,74.168 80.899,74.168 81.153,74.422 84.328,74.422 ; 107.142,65.548 v1@107.904,65.167
  Bottom Layer w0: 108.611,91.356 108.839,91.128
  Bottom Layer w0.25: 80.155,81.924 80.527,82.296 87.503,82.296 90.932,78.867 93.98,78.867 96.52,81.407 v1(96.52,81.661) ; v1(81.892,81.232) 82.55,81.534 86.614,81.534 88.265,79.883 88.265,79.248 89.662,77.851 90.678,76.835 90.678,73.533 90.678,72.644 v1(90.805,72.517) ; 85.979,72.517 87.452,73.99 89.014,73.99 ; 87.249,94.742 v1(87.757,94.742) 87.884,94.742 88.011,94.869 88.011,95.25 ; 89.014,72.339 89.472,71.882 94.742,71.882 95.504,71.12 95.504,70.612 ; 89.347,87.31 90.17,86.487 90.17,80.518 91.313,79.375 93.726,79.375 95.758,81.407 95.758,82.423 96.266,82.931 96.901,82.931 97.663,82.169 97.917,81.915 100.457,81.915 100.711,82.169 100.711,83.753 ; v1(90.297,78.359) 90.424,78.359 91.059,77.724 92.456,77.724 v1(92.71,77.978) 95.319,77.978 95.885,77.978 ; 91.059,93.98 91.059,93.472 90.805,93.218 90.805,80.772 91.694,79.883 93.396,79.883 v1(94.107,80.772) ; v1(91.694,72.898) 94.234,72.898 ; 92.837,74.93 92.837,74.295 v1(92.964,74.168) ; 93.287,82.176 93.287,82.608 92.837,83.058 92.837,85.09 93.726,85.979 ; v1(93.726,77.216) 94.361,77.216 94.869,76.708 94.869,73.406 v1(95.123,73.152) ; 93.853,83.693 96.774,83.693 99.06,85.979 101.473,85.979 101.854,85.598 101.854,83.88 ; 94.023,85.786 96.835,85.786 98.171,87.122 100.584,87.122 101.473,88.011 103.378,88.011 ; 94.234,75.244 94.234,73.914 94.234,72.898 ; 94.927,82.176 94.996,82.245 94.996,83.693 ; 96.223,84.836 97.028,84.836 98.679,86.487 100.584,86.487 v1(101.663,87.027) ; v1(96.52,73.152) 97.028,73.152 97.409,73.533 97.409,76.581 97.79,76.962 100.203,76.962 100.584,77.343 100.584,78.486 ; 97.467,78.232 98.142,78.031 v1(98.044,77.978) ; 98.044,75.244 98.044,72.506 97.928,72.39 ; v1@98.298,79.375 99.044,79.518 99.314,79.248 99.314,78.68 ; v3(98.679,73.279) 99.314,73.406 99.314,75.244 ; v1(99.187,72.263) 99.568,72.263 100.076,72.771 100.584,73.279 100.584,75.244 ; 99.314,70.044 99.314,71.12 100.33,72.136 103.124,72.136 103.632,72.644 104.14,73.152 106.045,73.152 107.061,72.136 107.511,72.136 ; 99.314,84.201 99.314,85.344 99.314,85.471 101.219,85.471 101.219,82.169 101.473,81.915 102.87,81.915 106.299,81.915 ; 100.457,69.723 100.457,68.58 100.076,68.199 99.187,68.199 98.679,68.707 98.679,71.639 97.928,72.39 ; 100.584,70.044 100.584,70.866 101.092,71.374 103.886,71.374 v1(105.537,72.39) ; 101.854,77.851 102.616,77.089 104.775,77.089 105.029,77.343 105.029,80.518 105.791,81.28 106.299,81.28 ; 101.981,67.691 102.108,67.564 v1@104.165,67.564 ; 102.235,68.892 102.235,69.215 v1(102.743,69.723) ; 104.013,67.818 104.013,67.564 v1@104.165,67.564 ; 104.546,67.945 v1@104.165,67.564 ; v1(104.902,75.311) 105.664,76.327 105.664,78.68 ; v1(105.791,73.914) 106.045,73.914 106.68,73.279 107.569,73.279 107.95,73.66 107.95,74.803 107.569,75.184 107.569,76.581 108.331,77.343 108.331,78.553 108.204,78.68 ; 106.934,78.68 106.934,80.645 106.426,81.153 106.299,81.28 ; v1(107.696,81.915) 109.982,81.915 110.744,82.677 110.744,83.321 111.615,84.192 ; 108.204,84.328 108.204,85.344 107.823,85.725 106.553,85.725 106.299,85.471 106.299,81.28 ; v1(108.839,87.757) 109.22,87.376 113.284,89.408 ; 94.234,72.898 94.742,72.39 97.928,72.39
  Bottom Layer w0.3: 78.486,84.201 79.13,84.201 79.375,83.956 ; 78.867,74.168 81.915,74.168 ; 80.376,85.69 81.488,86.801 81.798,86.801 ; 81.29,69.155 82.49,69.155 83.758,69.155 84.201,68.712 85.453,68.712 ; 81.394,76.53 81.693,76.53 v1(81.906,76.318) ; 81.407,74.168 81.394,74.181 81.394,74.879 81.394,74.689 81.915,74.168 ; 82.54,66.989 82.861,66.989 84.963,64.888 ; 82.54,89.475 82.54,89.164 85.217,86.487 86.784,86.487 86.911,86.36 ; 83.566,84.836 83.566,83.693 84.074,83.185 86.614,83.185 88.839,85.41 89.111,85.41 ; 84.328,80.264 83.439,80.264 82.677,79.502 82.677,74.93 81.915,74.168 ; 84.806,62.777 cw(c96.792,77.968) 110.272,91.85 ; 84.815,62.752 85.964,63.154 86.071,63.154 ; 85.344,72.263 85.344,74.803 86.233,75.692 v1(89.154,75.692) ; 85.725,84.582 86.868,84.582 88.011,85.725 88.011,86.614 88.707,87.31 89.111,87.31 89.347,87.31 ; 85.852,62.865 85.992,62.976 87.878,62.754 88.402,62.692 90.17,60.452 92.583,60.452 93.091,60.96 93.091,62.713 93.633,63.363 93.877,63.119 96.012,63.119 96.647,62.484 ; 86.284,80.251 86.233,80.2 86.233,77.851 88.443,77.851 88.519,77.851 v1(89.916,76.454) ; 87.196,70.357 88.139,70.357 89.569,68.927 ; 87.622,68.572 87.846,68.572 ; 87.928,60.711 ccw(c96.792,77.968) 95.774,58.595 ; 87.938,60.73 87.938,61.776 ; 89.535,68.892 89.731,68.892 91.059,67.564 94.107,67.564 94.234,67.691 94.234,70.044 ; 89.736,63.245 89.736,63.701 90.043,64.008 90.043,65.151 90.678,65.786 91.509,65.786 ; v1(90.414,61.735) ccw(c88.024,63.606) 91.059,63.606 91.059,63.627 91.128,63.696 92.075,63.696 ; 91.059,96.393 91.059,96.012 91.186,95.885 91.948,95.885 ; v1@91.44,81.476 91.44,85.725 93.472,87.757 96.52,87.757 97.155,88.392 99.822,88.392 100.584,89.154 v1@100.584,90.805 ; 91.625,65.786 94.615,65.786 95.631,66.802 96.869,68.04 97.377,68.04 98.044,68.707 98.044,70.044 ; v1(92.391,80.713) 92.202,81.28 92.202,85.598 93.726,87.122 96.901,87.122 97.536,87.757 100.375,87.757 101.37,88.752 101.6,89.366 101.6,92.202 102.489,93.091 102.489,93.726 ; 93.603,63.328 93.603,63.877 93.599,63.881 93.599,64.262 94.107,64.77 94.361,65.024 94.869,65.024 95.758,65.913 97.917,65.913 98.552,66.548 v4(98.552,67.437) ; 93.95,95.885 95.27,95.885 95.397,96.012 ; v1@94.488,89.535 96.266,91.313 96.901,91.948 99.568,91.948 100.584,92.964 100.584,93.726 ; v1@94.869,63.881 94.869,64.135 95.885,65.151 97.663,65.151 99.949,65.151 101.473,63.627 103.251,63.627 103.505,63.881 103.505,64.135 104.108,64.738 104.394,64.738 104.394,66.548 106.045,68.199 106.045,70.104 106.142,70.78 v1(106.426,70.993) ; 95.504,75.244 96.774,75.244 ; 95.504,75.819 95.504,79.375 97.409,81.28 103.632,81.28 104.394,80.518 104.394,78.994 ; v1@95.504,89.408 96.901,90.805 98.425,90.424 ; 95.758,59.563 95.784,59.537 95.784,58.595 ; 96.774,70.044 95.504,70.044 95.504,67.818 94.488,66.802 89.985,66.802 89.535,67.252 ; v1@96.774,89.281 95.758,88.265 94.107,88.265 93.599,88.773 93.599,89.916 97.409,93.726 98.552,93.726 ; 97.897,96.52 98.151,96.266 100.33,96.266 100.584,96.012 101.563,96.012 101.817,95.758 102.87,95.758 105.072,93.556 106.299,93.556 ; 98.298,93.345 98.552,93.345 ; 98.405,59.944 98.649,60.188 98.649,62.484 ; 100.584,83.88 100.711,83.753 ; 101.854,58.801 101.854,58.928 102.108,59.182 102.743,59.182 102.87,59.055 ; v1(102.235,76.454) 102.934,76.327 103.238,76.022 ; v1(102.387,90.602) v1@102.489,90.805 ; 103.124,78.68 104.394,78.68 ; v1(103.505,87.249) 103.124,87.249 ; 103.505,89.535 103.505,87.63 103.124,87.249 ; 104.394,83.88 103.124,83.88 103.124,85.198 103.124,87.249 ; 105.062,91.026 v1(104.521,91.567) 104.564,91.356 105.326,91.356 ; 105.664,83.88 105.664,89.771 106.807,90.914 107.249,91.356 ; 106.934,78.68 106.934,77.198 106.426,76.69 106.426,74.422 106.807,74.041 v1(107.061,74.041) ; 106.934,83.88 106.934,81.407 107.315,81.026 108.331,81.026 109.22,80.137 109.22,78.105 110.871,76.454 112.667,76.454 113.853,77.64 114.655,77.64 115.443,78.428 ; 107.144,89.363 106.854,89.263 106.299,88.125 106.299,86.614 106.553,86.36 108.458,86.36 109.22,85.598 109.347,85.471 113.03,85.471 114.046,84.455 114.046,81.915 113.03,80.899 111.76,80.899 111.633,80.772 v1(111.633,80.264) ; 107.315,87.376 107.315,87.63 108.627,88.942 110.754,89.475 ; 107.315,89.378 110.307,91.886 ; 107.381,69.172 107.381,72.006 107.511,72.136 ; 108.331,66.972 111.753,66.972 111.77,66.989 ; v1(109.093,77.089) 108.735,76.799 108.625,75.755 109.001,74.753 109.983,74.306 112.014,74.168 112.014,72.109 112.123,72 ; 109.151,72.136 109.281,72.006 109.281,69.172 109.619,68.834 111.125,68.834 113.665,67.31 ; v1(110.236,75.311) 110.109,75.311 113.03,75.311 113.538,75.819 v1(113.792,75.819) 116.713,75.819 ; v1(110.744,78.359) 112.141,78.359 112.522,78.74 ; 111.506,78.359 111.572,78.359 111.953,77.978 ; 111.953,77.64 111.953,78.171 112.522,78.74 ; 112.004,87.309 112.208,87.309 113.792,85.725 114.808,84.709 114.808,81.661 113.157,80.01 112.776,80.01 ; 113.02,69.155 114.173,70.308 v1(114.173,74.676) ; 115.189,80.137 113.792,78.74 112.522,78.74 ; 115.443,80.068 116.655,80.068 ; 81.915,74.168 82.296,74.168 83.058,73.406 83.058,72.898 83.058,71.501 83.693,70.866 85.471,70.866 86.868,68.707 87.846,68.572 ; 87.846,68.572 87.846,67.856 88.519,67.183 89.466,67.183 ; 89.466,67.183 89.535,67.252 ; 89.466,67.183 89.535,67.252 ; 116.655,80.068 116.713,80.01 116.655,80.068
  Bottom Layer w0.4: 103.505,89.535 103.674,89.704 103.674,90.72 104.31,91.356 104.945,91.356 105.326,91.356 ; 116.792,77.968 ccw(c96.792,77.968) 116.792,77.968
  Bottom Layer w0.5: v1@102.362,58.801 102.362,62.357 ; v1(107.823,64.897) 108.331,64.897 110.109,63.119
  other v1: 96.901,58.293 102.362,59.055 86.36,61.214 94.742,64.008 102.362,67.564 104.394,67.564 115.697,72.263 103.759,74.676 98.526,79.419 91.519,81.476 114.681,86.36 94.488,89.408 96.739,89.408 100.584,90.551
  other v2: 104.394,62.103 106.299,62.103 104.394,64.262

## Keep-outs
Keep-Out Layer:
  lines w0.2: 79.127,88.566 ccw(c96.792,77.968) 114.647,88.242 ; 79.2,88.492 cw(c96.792,77.968) 114.573,88.17

## Other copper
Top Layer:
  text "R" at 75.946,92.583 h5
Bottom Layer:
  text "R" at 117.094,93.599 h5

## Silkscreen, mask and mechanical layers (free items; w line width, h text height)
Top Overlay:
  circle w0.3: c87.457,83.82 r0.3
  circle w0.4: c96.792,77.968 r20.2
  rectangle: 77.47,73.152 80.391,73.66
  lines w0.1: 101.727,79.756 103.505,85.471
  lines w0.6: 96.266,91.313 97.282,92.329 ; 97.282,89.535 97.282,92.329 ; 98.234,91.376 97.282,92.329
  text "1" at 103.769,94.859 h2
  text "6" at 107.061,93.218 h2
  text "2" at 85.608,92.573 h2
  text "Tx" at 99.441,92.329 h1
  text "G" at 104.775,92.329 h1
  text "Rx" at 97.79,90.17 h1
  text "3.3" at 103.886,89.281 h1
  text "Colias" at 84.328,86.233 h2.8
  text "www.colias.uk" at 84.201,85.217 h1.3
  text "CIL" at 112.243,79.654 h2.7
  text "SI" at 80.518,78.74 h1.5
  text "Lincoln" at 111.76,78.613 h1.7
  text "SO" at 80.518,77.597 h1.5
  text "UK" at 114.173,77.47 h2
  text "S" at 80.518,76.2 h1.5
  text "ATmega 644" at 90.297,75.946 h1.5
  text "R" at 80.518,75.057 h1.5
  text "G" at 80.518,73.787 h1.5
  text "3" at 78.232,71.374 h2
  text "ADJ" at 97.708,68.371 h1.5
  text "5" at 112.141,66.929 h2
  text "3.3" at 103.505,62.992 h1
  text "L" at 103.378,61.849 h1
  text "P" at 105.156,61.849 h1
  text "4" at 103.251,59.563 h2
Bottom Overlay:
  circle w0.3: c96.792,77.968 r20
  rectangle: 87.503,90.551 97.282,91.059
  text "AMiR-II" at 97.409,91.313 h3
  text "Lincoln" at 93.98,89.281 h2
  text "UK" at 93.98,87.884 h2
  text "2013" at 93.98,86.741 h1.3
  text "F. Arvin" at 95.25,78.994 h2

## Text inside footprints (layer, text, board x,y; h text height)
?: Top Overlay "PB" at 84.836,73.66 h1 r90
?: Bottom Overlay "XT" at 86.36,74.549 h1